# Altium PCB Prototype_1.PcbDoc
Units mm, origin at the board's own origin, x right, y up, seen from the top; angles counter-clockwise.
Board outline 94.49 x 99.95 mm, 2 copper layers (Top Layer, Bottom Layer); 50 components, 46 nets, 192 pads, 72 vias.
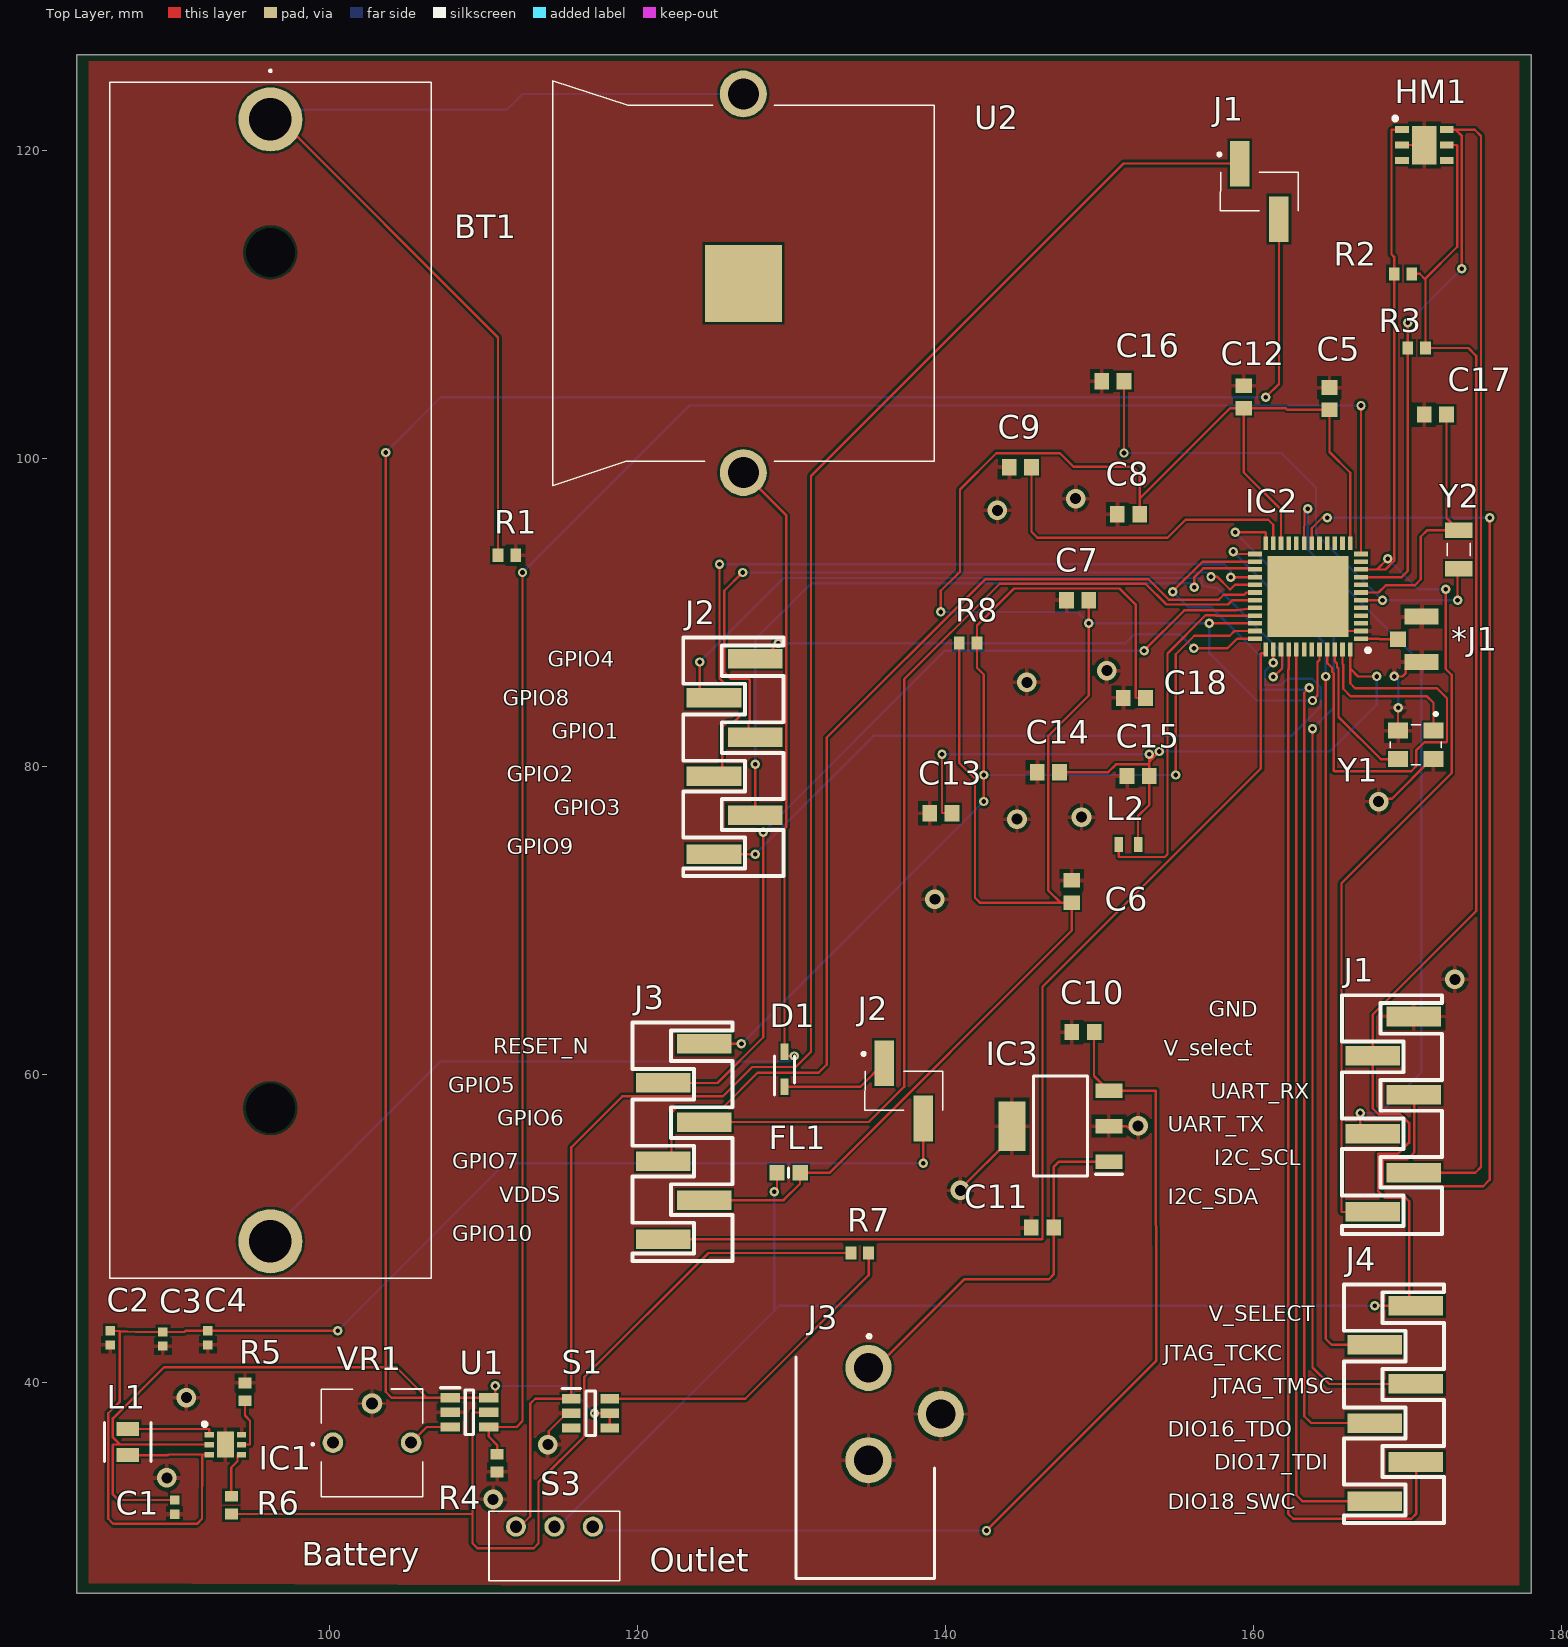
[diagram p0: Top Layer view]
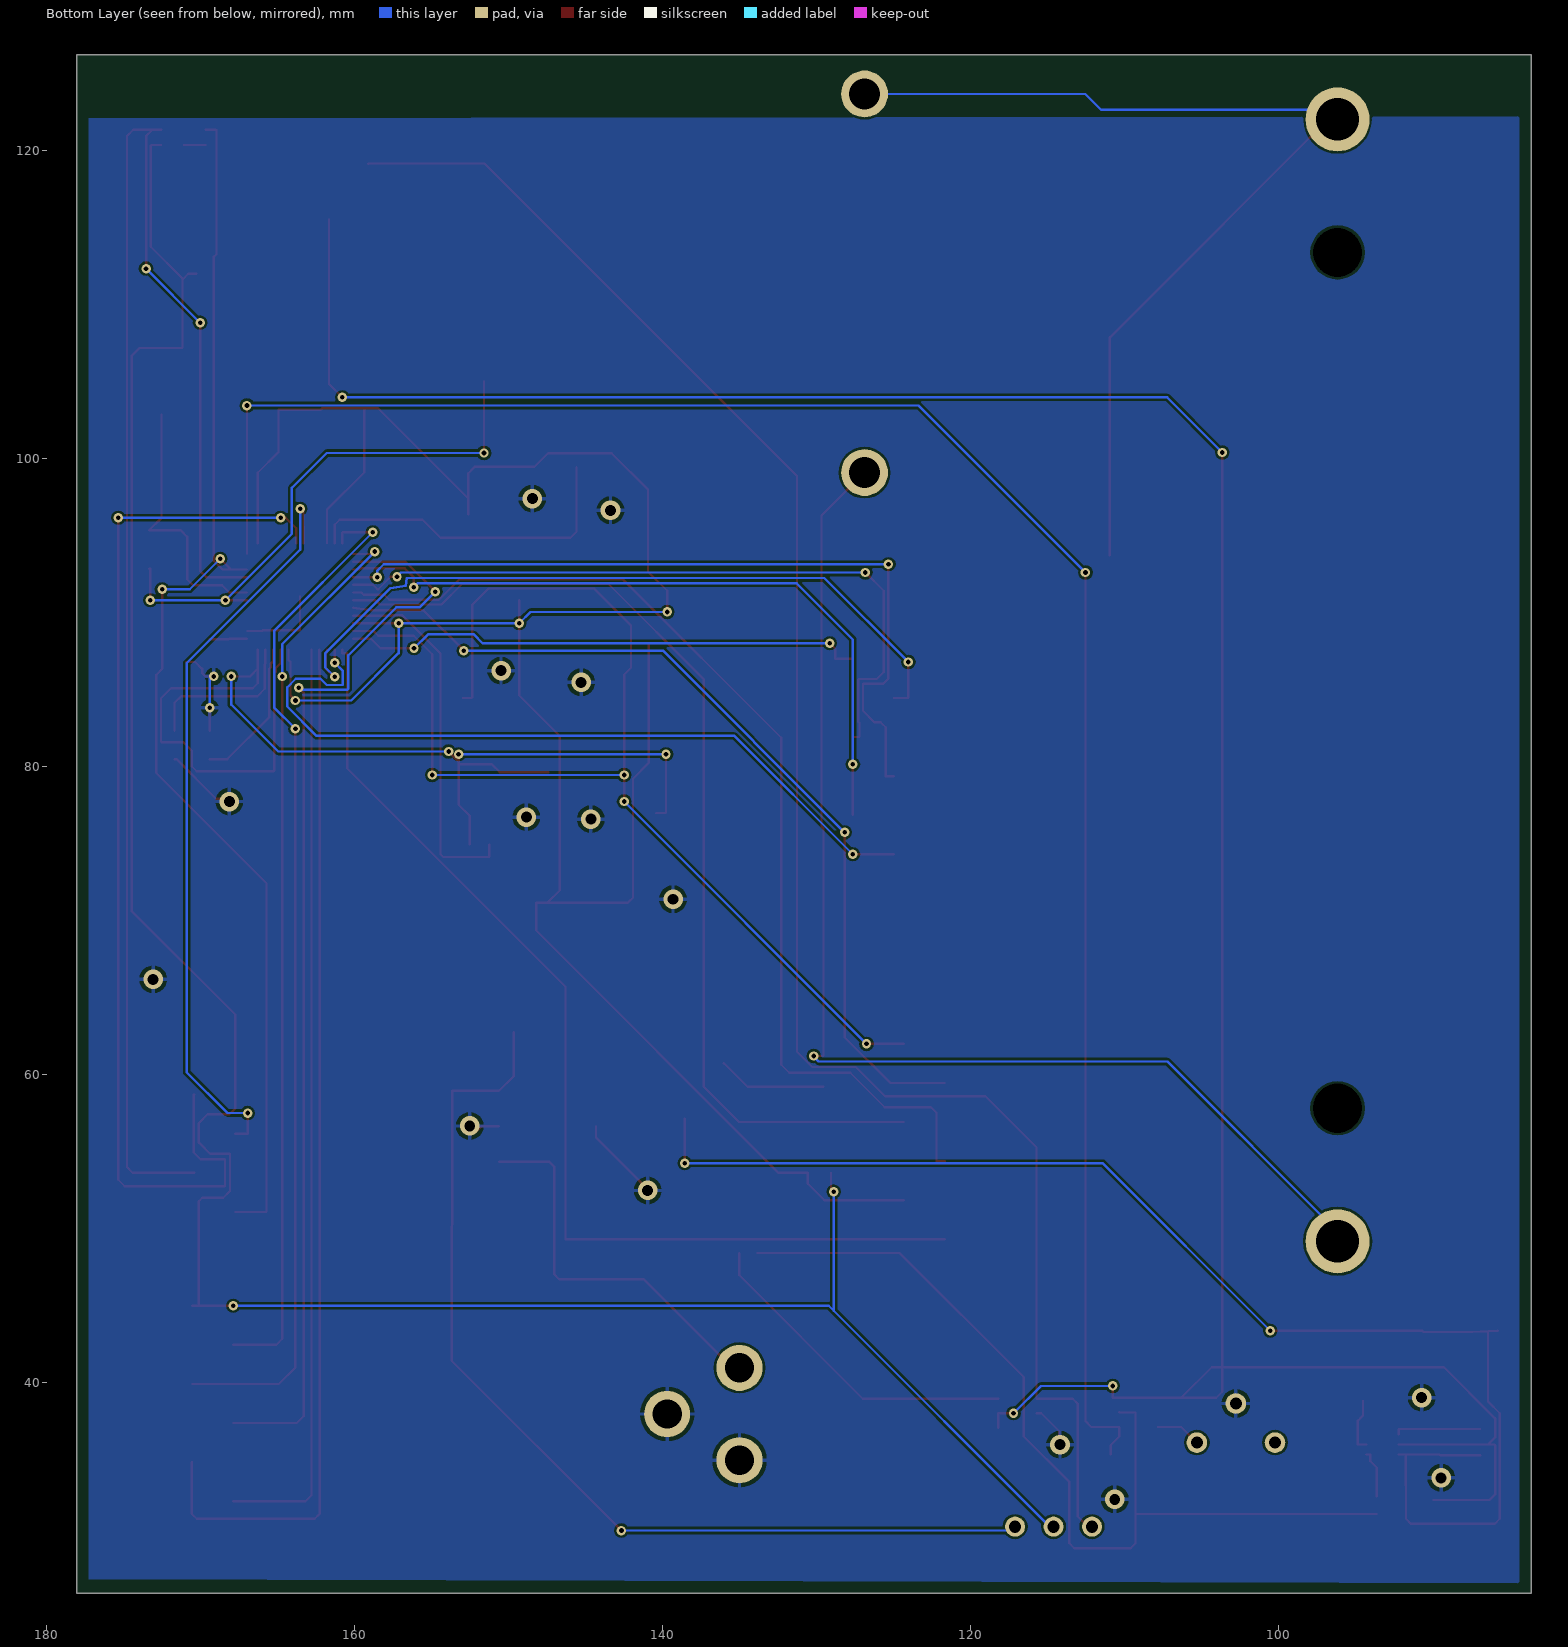
[diagram p1: Bottom Layer view, seen from below]
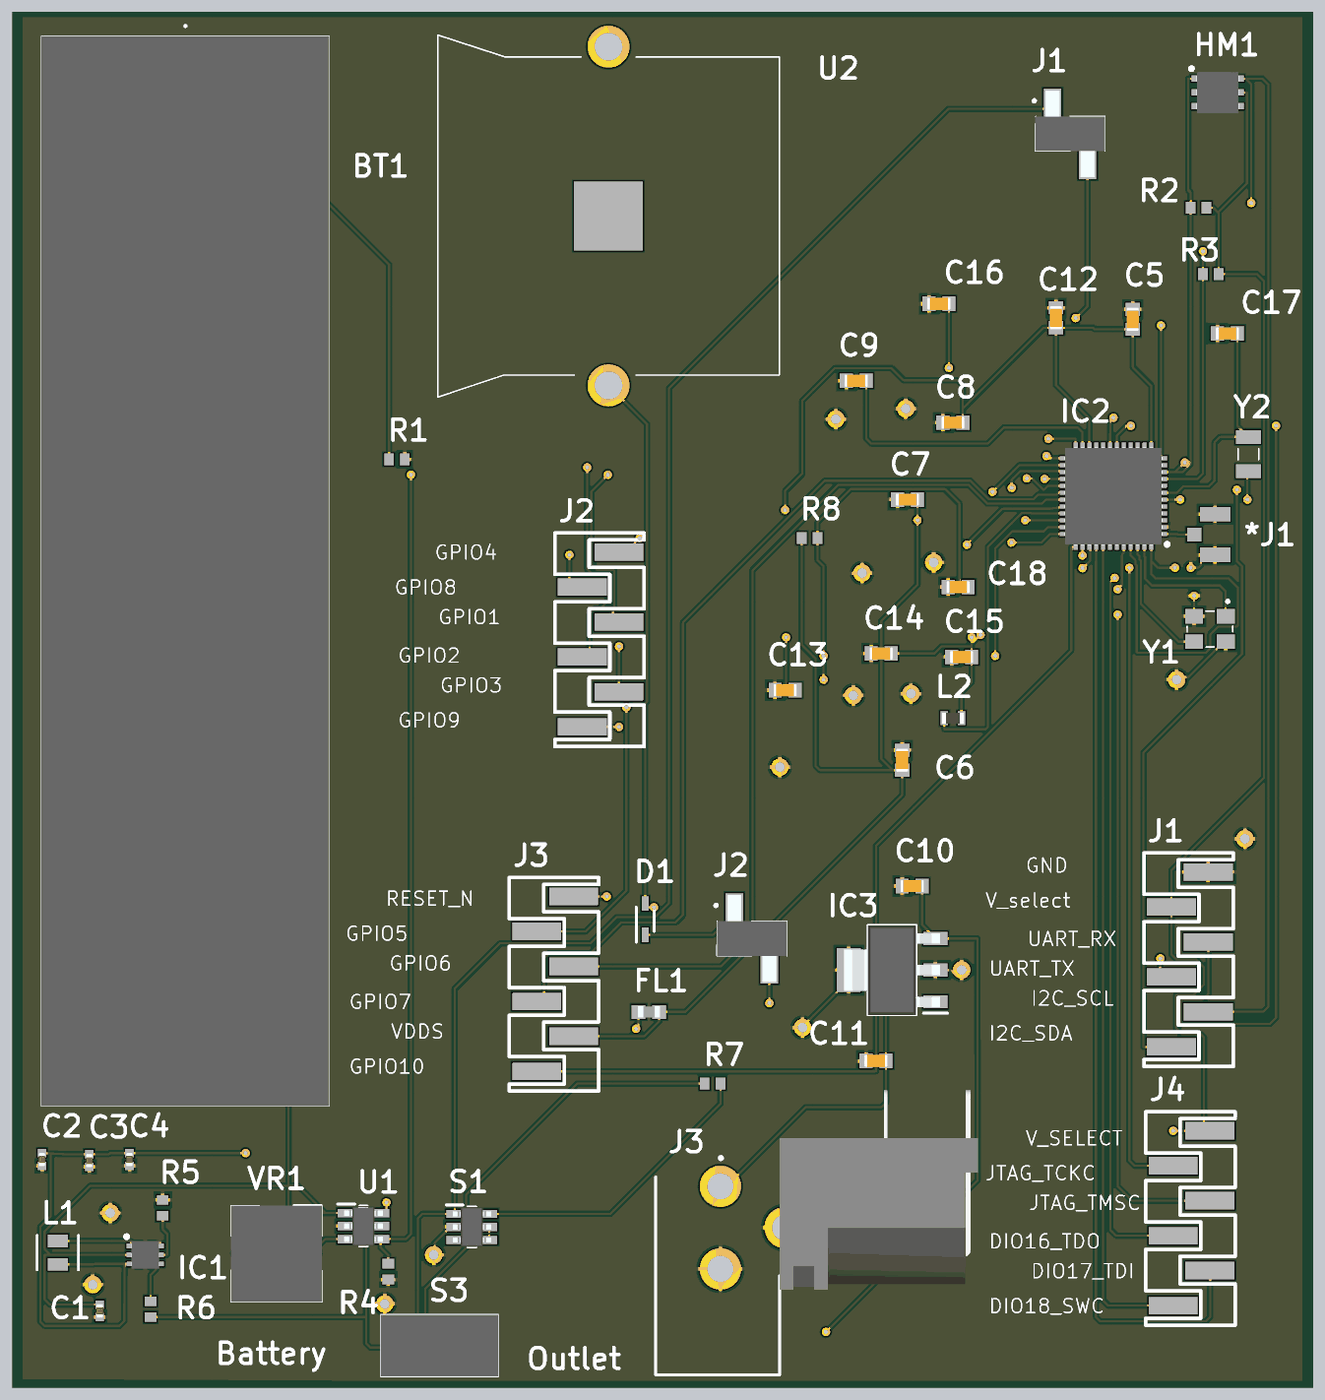
[diagram p2: 3D render of the assembled board from above, using the file's embedded part models]

## Layer stack, top to bottom
Top Solder: solder mask 0.0102, Solder Resist, Dk 3.5
Top Layer: signal copper 0.0356
Dielectric 1: dielectric 0.32, FR-4, Dk 4.8
Bottom Layer: signal copper 0.0356
Bottom Solder: solder mask 0.0102, Solder Resist, Dk 3.5

## Board outline
83.566,26.289 83.566,126.238 178.054,126.238 178.054,26.289

## Design rules (kind name [scope] priority, off if disabled: settings)
BoardOutlineClearance [All] p1: gap=0.406 ignorepadtopadclearanceinfootprint=FALSE except(0: Arc-SplitContinuation Track-SplitContinuation SMDPad-SplitContinuation THPad-SplitContinuation Via-SplitContinuation Fill-SplitContinuation Poly-SplitContinuation Region-SplitContinuation Text-SplitContinuation)
Clearance [All] p1: gap=0.152 ignorepadtopadclearanceinfootprint=FALSE
HoleSize [All] p1: absolutevalues=TRUE maxlimit=6.223 minlimit=0.305 maxpercent=80.000 minpercent=20.000
MinimumSolderMaskSliver [All] p1 off: minsoldermaskwidth=0.254
NetAntennae [All] p1 off: netantennaetolerance=0
PolygonConnect [All] p1: connectstyle=Relief reliefconductorwidth=0.254 reliefentries=4 polygonreliefangle="90 Angle" airgapwidth=0.254
RoutingVias [All] p1: holewidth=0.305 width=0.61 viastyle="Through Hole" minholewidth=0.152 minwidth=0.305 maxholewidth=0.6 maxwidth=1.2
SilkToSilkClearance [All] p1 off: silktosilkclearance=0.254
SilkToSolderMaskClearance [IsPad] p1 off: minsilkscreentomaskgap=0.254 clearancetoexposedcopper=TRUE
SolderMaskExpansion [All] p1: expansion=0.102
Width [All] p1: maxlimit=2 minlimit=0.152 preferedwidth=0.152 minimp=50.000000 maximp=50.000000 favimp=50.000000
25 further rules are at their usual default settings.

## Classes and differential pairs
component class Sheet2.SchDoc: C12 C13 C14 C15 C16 C17 C18 FL1 J3 J4 L2 S3
component class Prototype_1: C10 C11 IC3 J3

## Components (designator, comment, footprint, x,y, rotation, side; value= is the part's Value field where it differs from the comment)
*J1 "UFL_Connector" UFL_Connector 168.893,90.265 r270 top
BT1 "BH-18650-PC" BH18650PC 96.139,122.049 r270 top
C1 "GRM155R71H471KA01D" CAPC1005X55N 89.916,31.877 r270 top
C2 "GRM155R71H471KA01D" CAPC1005X55N 85.725,42.878 r270 top
C3 "GRM155R71H471KA01D" CAPC1005X55N 89.154,42.799 r270 top
C4 "GRM155R71H471KA01D" CAPC1005X55N 92.075,42.878 r270 top
C5 ".1uF" CAPC1608X90X35ML10T15 164.956,103.898 r270 top
C6 ".1uF" CAPC1608X90X35ML10T15 148.209,71.882 r270 top
C7 ".1uF" CAPC1608X90X35ML10T15 148.59,90.805 r0 top
C8 "22uF" CAPC1608X90X35ML10T15 151.892,96.393 r0 top
C9 "1uF" CAPC1608X90X35ML10T15 144.87,99.441 r0 top
C10 "33uF" CAPC1608X90X35ML10T15 148.934,62.738 r0 top
C11 "33uF" CAPC1608X90X35ML10T15 146.304,50.038 r0 top
C12 ".1uF" CAPC1608X90X35ML10T15 159.385,104.013 r270 top
C13 "22uF" CAPC1608X90X35ML10T15 139.7,76.962 r0 top
C14 ".1uF" CAPC1608X90X35ML10T15 146.685,79.629 r0 top
C15 ".1uF" CAPC1608X90X35ML10T15 152.527,79.375 r0 top
C16 "12pF" CAPC1608X90X35ML10T15 150.876,105.029 r0 top
C17 "12pF" CAPC1608X90X35ML10T15 171.831,102.87 r0 top
C18 ".1uF" CAPC1608X90X35ML10T15 152.273,84.455 r0 top
D1 "1SS315TPH3F" SOD2513X110N 129.54,60.325 r90 top
FL1 "BLM18HE152SN1B" BEADC1608X95N 129.806,53.594 r0 top
HM1 "HDC1080DMBT" SON100P300X300X80-7N 171.122,120.38 r0 top
IC1 "TPS61291DRVT" SON65P200X200X80-7N 93.218,35.941 r0 top
IC2 "XCC1352R1F3RGZR" QFN50P700X700X100-49N-D 163.555,91.055 r180 top
IC3 "LM3940IMP-3.3_NOPB" SOT230P700X180-4N 147.472,56.628 r180 top
J1 "87898-0204" 878980204 160.401,117.37 r0 top
J1 "Header_Pin_6" Header_Pin_6 167.767,56.134 r270 top
J2 "87898-0204" 878980204 137.287,58.928 r0 top
J2 "Header_Pin_6" Header_Pin_6 124.968,79.375 r270 top
J3 "PJ-102A" PJ-102AH 139.301,37.925 r180 top
J3 "Header_Pin_6" Header_Pin_6 121.666,54.356 r270 top
J4 "Header_Pin_6" Header_Pin_6 167.894,37.338 r270 top
L1 "VLF302515MT-3R3M" VLF302515MT 86.868,36.107 r90 top
L2 "6.8uH" "SMD 0603_A" 151.892,74.93 r0 top
R1 "1 ohm" RESC1609X50X30LL10T20 111.506,93.726 r180 top
R2 "4.7k" RESC1609X50X30LL10T20 169.732,112.014 r0 top
R3 "4.7k" RESC1609X50X30LL10T20 170.621,107.188 r0 top
R4 "10k" RESC1609X50X30LL10T20 110.871,34.731 r270 top
R5 "0" RESC1609X50X30LL10T20 94.488,39.37 r270 top
R6 "0" RESC1609X50X30LL10T20 93.599,32.004 r90 top
R7 "0" RESC1609X50X30LL10T20 134.433,48.387 r0 top
R8 "100k" RESC1609X50X30LL10T20 141.478,88.011 r0 top
S1 "TPS22860DBVR" SOT95P280X145-6N 116.947,37.973 r0 top
S3 "MHSS1105" MHSS1105 114.594,29.357 r90 top
U1 "TPL5111DDCR" SOT95P280X110-6N 109.073,38.034 r0 top
U2 "BHX1-2032-PC" BHX12032PC 126.873,123.698 r270 top
VR1 "3362P-1-101LF" 3362P1101LF 100.203,36.068 r0 top
Y1 "CX2016DB48000C0FPLC1" CX2016DB48000C0FPLC1 170.561,81.407 r180 top
Y2 "FC-135_32.7680KA-AG0" FC135327680KAAG0 173.355,94.107 r270 top

## Footprints (in the part's own frame and the unit in brackets; to place one, negate y for a bottom-side part, rotate by r counter-clockwise, add the part's x,y. Pads: shape width x height; smd on the part's side, far side on the other; paste and mask are expansions set on the pad)
3362P1101LF [mm]
  round 1.337 hole 0.78: 1(0,0) 2(2.54,2.54) 3(5.08,0)
  silkscreen extent -1.36,-3.53 5.84,3.5, body extent -0.76,-3.53 5.84,3.46, height 4.95
878980204 [mm]
  rect 1.27x2.96 smd: 1(-1.27,1.8) 2(1.27,-1.8)
  silkscreen extent -2.7,-1.26 2.54,2.5, body extent -2.54,-3.15 2.54,3.15, height 8.43
BEADC1608X95N [mm]
  rect 1x1 smd: 1(-0.75,0) 2(0.75,0)
  silkscreen extent 0,-0.3 0,0.3, body extent -0.8,-0.4 0.8,0.4, height 0.95
BH18650PC [mm]
  round 4.155 hole 2.77: 1(0,0) 2(72.9,0)
  round 1.6 hole 3.2 unplated: MH1(8.645,0) MH2(64.255,0)
  silkscreen extent -3.2,-10.45 75.3,10.45, body extent -2.4,-10.45 75.3,10.45, height 21.31
BHX12032PC [mm]
  round 3.045 hole 2.03: 1(0,0) 2(24.6,0)
  rect 5x5 smd: 3(12.3,0)
  silkscreen extent -0.85,-12.4 25.45,12.4
CAPC1005X55N [mm]
  rect 0.6x0.62 smd: 1(-0.46,0) 2(0.46,0)
  body extent -0.5,-0.25 0.5,0.25, height 0.55
CAPC1608X90X35ML10T15 [mm] "Chip Capacitor, 2-Leads, Body 1.7x0.9mm, IPC Low Density"
  rect 0.95x1.05 smd: 1(-0.725,0) 2(0.725,0)
  body extent -0.85,-0.45 0.85,0.45, height 0.9
CX2016DB48000C0FPLC1 [mm]
  rect 1.3x1.05 smd: 1(-1.15,-0.925) 2(1.15,-0.925) 3(1.15,0.925) 4(-1.15,0.925)
  silkscreen extent -1.66,-2.1 1.66,1.3
FC135327680KAAG0 [mm]
  rect 1x1.8 smd: 1(-1.25,0) 2(1.25,0)
  silkscreen extent -0.4,-0.75 0.4,0.75
Header_Pin_6 [mm]
  rect 1.27x3.56 smd: 1(-7.62,2.67) 2(-5.08,0) 3(-2.54,2.67) 4(0,0) 5(2.53,2.67) 6(5.08,0)
  silkscreen extent -9,-2 6.5,4.5
MHSS1105 [mm]
  round 1.3 hole 0.8: 1(1.25,2.5) 2(1.25,0) 3(1.25,-2.5)
  silkscreen extent -2.25,-4.25 2.25,4.25, body extent -2.25,-4.25 2.25,4.25, height 4
PJ-102AH [mm]
  round 3 hole 1.9: 1(4.3,-3) 2(4.3,3) 3(-0.4,0)
  silkscreen extent 0,-5.17 9,10.7, body extent -14.4,-10 0,4.5, height 4.5
QFN50P700X700X100-49N-D [mm]
  rect 0.9x0.3 smd: 1(-3.45,2.75) 2(-3.45,2.25) 3(-3.45,1.75) 4(-3.45,1.25) 5(-3.45,0.75) 6(-3.45,0.25) 7(-3.45,-0.25) 8(-3.45,-0.75) 9(-3.45,-1.25) 10(-3.45,-1.75) 11(-3.45,-2.25) 12(-3.45,-2.75) 25(3.45,-2.75) 26(3.45,-2.25) 27(3.45,-1.75) 28(3.45,-1.25) 29(3.45,-0.75) 30(3.45,-0.25) 31(3.45,0.25) 32(3.45,0.75) 33(3.45,1.25) 34(3.45,1.75) 35(3.45,2.25) 36(3.45,2.75)
  rect 0.3x0.9 smd: 13(-2.75,-3.45) 14(-2.25,-3.45) 15(-1.75,-3.45) 16(-1.25,-3.45) 17(-0.75,-3.45) 18(-0.25,-3.45) 19(0.25,-3.45) 20(0.75,-3.45) 21(1.25,-3.45) 22(1.75,-3.45) 23(2.25,-3.45) 24(2.75,-3.45) 37(2.75,3.45) 38(2.25,3.45) 39(1.75,3.45) 40(1.25,3.45) 41(0.75,3.45) 42(0.25,3.45) 43(-0.25,3.45) 44(-0.75,3.45) 45(-1.25,3.45) 46(-1.75,3.45) 47(-2.25,3.45) 48(-2.75,3.45)
  rect 5.25x5.25 smd: 49(0,0)
  silkscreen extent -4.03,3.38 -3.78,3.62, body extent -3.55,-3.55 3.55,3.55, height 1
RESC1609X50X30LL10T20 [mm] "Chip Resistor, 2-Leads, Body 1.55x0.85mm, IPC High Density"
  rect 0.7x0.85 smd: 1(-0.575,0) 2(0.575,0)
  body extent -0.82,-0.48 0.82,0.48, height 0.5
"SMD 0603_A" [mm] "Molded Inductor, 2-Leads, Body 1,6x0,8mm"
  rect 0.55x1 smd: 1(-0.625,0) 2(0.625,0)
  body extent -0.8,-0.4 0.8,0.4, height 0.78
SOD2513X110N [mm]
  rect 1.05x0.5 smd: 1(-1.138,0) 2(1.138,0)
  silkscreen extent -1.66,-0.65 0.87,0.65
SON65P200X200X80-7N [mm]
  rect 0.6x0.35 smd: 1(-1.05,0.65) 2(-1.05,0) 3(-1.05,-0.65) 4(1.05,-0.65) 5(1.05,0) 6(1.05,0.65)
  rect 1.1x1.7 smd: 7(0,0)
  silkscreen extent -1.47,1.2 -1.22,1.45, body extent -1.05,-1 1.05,1, height 0.8
SON100P300X300X80-7N [mm]
  rect 0.9x0.45 smd: 1(-1.45,1) 2(-1.45,0) 3(-1.45,-1) 4(1.45,-1) 5(1.45,0) 6(1.45,1)
  rect 1.6x2.5 smd: 7(0,0)
  silkscreen extent -2.02,1.6 -1.77,1.85, body extent -1.55,-1.5 1.55,1.5, height 0.8
SOT95P280X110-6N [mm]
  rect 1.25x0.6 smd: 1(-1.25,0.95) 2(-1.25,0) 3(-1.25,-0.95) 4(1.25,-0.95) 5(1.25,0) 6(1.25,0.95)
  silkscreen extent -1.87,-1.45 0.28,1.6, body extent -1.4,-1.45 1.4,1.45, height 1.1
SOT95P280X145-6N [mm]
  rect 1.2x0.6 smd: 1(-1.25,0.95) 2(-1.25,0) 3(-1.25,-0.95) 4(1.25,-0.95) 5(1.25,0) 6(1.25,0.95)
  silkscreen extent -1.85,-1.45 0.3,1.6, body extent -1.4,-1.45 1.4,1.45, height 1.45
SOT230P700X180-4N [mm]
  rect 1.75x0.95 smd: 1(-3.15,2.3) 2(-3.15,0) 3(-3.15,-2.3)
  rect 1.75x3.2 smd: 4(3.15,0)
  silkscreen extent -4.02,-3.25 1.75,3.25, body extent -3.5,-3.25 3.5,3.25, height 1.8
UFL_Connector [mm] "CONN U.FL RCPT STR 50 OHM SMD"
  rect 1.05x2.2 smd: 1(0.525,2.05) 2(3.475,2.05)
  rect 1x1.05 smd: 3(2,0.525)
VLF302515MT [mm]
  rect 0.9x1.45 smd: 1(-0.85,0) 2(0.85,0)
  silkscreen extent -1.25,-1.5 1.25,1.5

## Part data
*J1: "CONN U.FL RCPT STR 50 OHM SMD"
BT1: "Battery", Manufacturer_Name="MPD (Memory Protection Devices)", Datasheet Link=http://www.memoryprotectiondevices.com/datasheets/BH-18650-PC-datasheet.pdf, Height=21.31mm, Manufacturer_Part_Number=BH-18650-PC
C1 C2 C3 C4: "Capacitor", Manufacturer_Name="Murata Electronics", Mouser Part Number=81-GRM36X471K50, RS Part Number=7235301, Datasheet Link=http://www.murata.com/~/media/webrenewal/support/library/catalog/products/capacitor/mlcc/c02e.pdf, Height=0.55mm, Manufacturer_Part_Number=GRM155R71H471KA01D, Mouser Price/Stock=https://www.mouser.com/Search/Refine.aspx?Keyword=81-GRM36X471K50, RS Price/Stock=https://uk.rs-online.com/web/p/products/7235301
C5 C6 C7 C8 C9 C10 C11 C12 C13 C14 C15 C16 C17 C18: library part CMP-2000-04945-1, "Chip Capacitor, 22 pF, +/- 5%, 50 V, -55 to 125 degC, 0603 (1608 Metric), RoHS, Tape and Reel", Capacitance=22pF, Case Size/Dimension=0603, Dielectric=C0G, Manufacturer=Murata, Package Description="2-Pin Surface Mount Device, Body 1.6 x 0.8 mm", Package Reference=603, Rated Voltage=50V, Tolerance (%)=±5%, Datasheet URL=https://datasheet.ciiva.com/11786/0900766b807a1cab-11786398.pdf, Datasheet Version=Jul-06, Manufacturer URL=http://www.murata.com/
D1: "Schottky Diode", Manufacturer_Name=Toshiba, Mouser Part Number=757-1SS315TPH3F, Datasheet Link=http://toshiba.semicon-storage.com/info/docget.jsp?did=2666&prodName=1SS315, Height=1.1mm, Manufacturer_Part_Number=1SS315TPH3F, Mouser Price/Stock=https://www.mouser.com/Search/Refine.aspx?Keyword=757-1SS315TPH3F
FL1: "Filter", Manufacturer_Name="Murata Electronics", Mouser Part Number=N/A, Datasheet Link=https://www.murata.com/en-us/products/productdetail?partno=BLM18HE152SN1%23, Height=0.95mm, Manufacturer_Part_Number=BLM18HE152SN1B, Mouser Price/Stock=https://www.mouser.com/Search/Refine.aspx?Keyword=N%2FA
HM1: "Hygrometer", Manufacturer_Name="Texas Instruments", Mouser Part Number=595-HDC1080DMBT, RS Part Number=1330170P, Datasheet Link=http://www.mouser.com/ds/2/405/hdc1080-844688.pdf, Height=0.8mm, Manufacturer_Part_Number=HDC1080DMBT, Mouser Price/Stock=https://www.mouser.com/Search/Refine.aspx?Keyword=595-HDC1080DMBT, RS Price/Stock=http://uk.rs-online.com/web/p/products/1330170P
IC1: "Integrated Circuit", Manufacturer_Name="Texas Instruments", Mouser Part Number=595-TPS61291DRVT, RS Part Number=9143112P, Datasheet Link=http://uk.rs-online.com/web/p/products/9143112P, Height=0.8mm, Manufacturer_Part_Number=TPS61291DRVT, Mouser Price/Stock=https://www.mouser.com/Search/Refine.aspx?Keyword=595-TPS61291DRVT, RS Price/Stock=http://uk.rs-online.com/web/p/products/9143112P
IC2: "Integrated Circuit", Manufacturer_Name="Texas Instruments", Datasheet Link=http://www.ti.com/lit/gpn/cc1352r, Height=1mm, Manufacturer_Part_Number=XCC1352R1F3RGZR
IC3: "Integrated Circuit", Manufacturer_Name="Texas Instruments", Manufacturer_Part_Number=LM3940IMP-3.3/NOPB, Mouser Part Number=926-LM3940IMP3.3NOPB, RS Part Number=5361546P, Datasheet Link=http://www.ti.com/lit/ds/symlink/lm3940.pdf, Height=1.8mm, Mouser Price/Stock=https://www.mouser.com/Search/Refine.aspx?Keyword=926-LM3940IMP3.3NOPB, RS Price/Stock=http://uk.rs-online.com/web/p/products/5361546P
J1 J2: "Connector", Manufacturer_Name=Molex, Mouser Part Number=538-87898-0204, Allied_Number=70967354, Allied Price/Stock=https://www.alliedelec.com/molex-incorporated-87898-0204/70967354/, Datasheet Link=https://www.molex.com/pdm_docs/sd/878980204_sd.pdf, Height=8.33mm, Manufacturer_Part_Number=87898-0204, Mouser Price/Stock=https://www.mouser.com/Search/Refine.aspx?Keyword=538-87898-0204
J3: "Connector", Manufacturer_Name=CUI, Mouser Part Number=490-PJ-102A, Datasheet Link=https://www.cui.com/product/resource/pj-102a.pdf, Manufacturer_Part_Number=PJ-102A, Mouser Price/Stock=https://www.mouser.com/Search/Refine.aspx?Keyword=490-PJ-102A
L1: "Inductor", Manufacturer_Name=TDK, Mouser Part Number=810-VLF302515MT-3R3M, Datasheet Link=https://product.tdk.com/info/en/documents/wdcatalog/withdrawn_inductor_commercial_power_vlf302515mt_en.pdf, Manufacturer_Part_Number=VLF302515MT-3R3M, Mouser Price/Stock=https://www.mouser.com/Search/Refine.aspx?Keyword=810-VLF302515MT-3R3M
L2: library part CMP-1392-00021-1, "Power Multilayer Inductor WE-PMI, L=0.47 µH", Inductance="0.47 µH", Manufacturer="Wuerth Elektronik", PartNumber=74479763147, ComponentLink1Description="Manufacturer URL", ComponentLink1URL=http://www.we-online.com, ComponentLink2Description=Datasheet, ComponentLink2URL=http://katalog.we-online.de/kataloge/eisos/media/pdf/74479763147.pdf, PackageReference="SMD 0603_A"
R1 R2 R3 R4 R5 R6 R7 R8: library part CMP-2000-03820-1, Manufacturer="Vishay Dale", Part Number=CRCW0603100KFKEA
S1: "Switch", Manufacturer_Name="Texas Instruments", Mouser Part Number=595-TPS22860DBVR, Datasheet Link=http://www.ti.com/lit/gpn/tps22860, Height=1.45mm, Manufacturer_Part_Number=TPS22860DBVR, Mouser Price/Stock=https://www.mouser.com/Search/Refine.aspx?Keyword=595-TPS22860DBVR
S3: "Switch", Manufacturer_Name=Apem, Mouser Part Number=642-MHSS1105, Datasheet Link=https://componentsearchengine.com/Datasheets/2/MHSS1105.pdf, Height=4mm, Manufacturer_Part_Number=MHSS1105, Mouser Price/Stock=https://www.mouser.com/Search/Refine.aspx?Keyword=642-MHSS1105
U1: "Undefined or Miscellaneous", Manufacturer_Name="Texas Instruments", Mouser Part Number=595-TPL5111DDCR, Datasheet Link=http://www.ti.com/lit/ds/symlink/tpl5111.pdf, Height=1.1mm, Manufacturer_Part_Number=TPL5111DDCR, Mouser Price/Stock=https://www.mouser.com/Search/Refine.aspx?Keyword=595-TPL5111DDCR
U2: "Undefined or Miscellaneous", Manufacturer_Name="MPD (Memory Protection Devices)", Datasheet Link=http://www.memoryprotectiondevices.com/datasheets/BHX1-2032-PC-datasheet.pdf, Height=4.16mm, Manufacturer_Part_Number=BHX1-2032-PC
VR1: "Variable Resistor", Manufacturer_Name=Bourns, Mouser Part Number=652-3362P-1-101LF, RS Part Number=5220877P, Allied_Number=70154047, Allied Price/Stock=https://www.alliedelec.com/bourns-3362p-1-101lf/70154047/, Datasheet Link=https://www.bourns.com/docs/Product-Datasheets/3362.pdf, Height=4.95mm, Manufacturer_Part_Number=3362P-1-101LF, Mouser Price/Stock=https://www.mouser.com/Search/Refine.aspx?Keyword=652-3362P-1-101LF, RS Price/Stock=http://uk.rs-online.com/web/p/products/5220877P
Y1: "Crystal or Oscillator", Manufacturer_Name="Kyocera Electronic Components", Mouser Part Number=581-CX2016DB48CFPLC1, Datasheet Link=https://componentsearchengine.com/Datasheets/1/CX2016DB48000C0FPLC1.pdf, Manufacturer_Part_Number=CX2016DB48000C0FPLC1, Mouser Price/Stock=https://www.mouser.com/Search/Refine.aspx?Keyword=581-CX2016DB48CFPLC1
Y2: "Crystal or Oscillator", Manufacturer_Name="Epson Timing", Manufacturer_Part_Number="FC-135 32.7680KA-AG0", Mouser Part Number=732-FC135-32.76KAAG0, Datasheet Link=https://support.epson.biz/td/api/doc_check.php?dl=brief_FC-135&lang=en/.pdf, Height=0mm, Mouser Price/Stock=https://www.mouser.com/Search/Refine.aspx?Keyword=732-FC135-32.76KAAG0

## Via types
v1: diameter 0.61, hole 0.305, Top Layer to Bottom Layer, 57 vias
v2: diameter 1.27, hole 0.711, Top Layer to Bottom Layer, 15 vias

## Nets (pads, with @x,y where several pads share a name; then routed paths per layer and width w, separated by ;. In a path a pad name is that pad's centre, name@x,y a point inside that pad or via, vN(x,y) a via of type N, cw(c..) or ccw(c..) an arc to the next point about the centre after c; other vN are vias at no path point)
DCDC_SW: IC2.33 L2.1 | length 23.8
  Top Layer w0.152: L2.1 151.267,74.143 151.292,74.117 154.254,74.117 154.432,74.295 154.432,87.351 156.92,89.838 157.548,89.838 157.582,89.805 IC2.33
DIO16_TDO: IC2.26 J4.4 | length 71.2
  Top Layer w0.152: v1(154.762,91.364) 156.703,93.305 IC2.26 ; v1(163.639,85.115) 163.322,84.798 163.322,37.782 163.766,37.338 J4.4
  Bottom Layer w0.152: v1(154.762,91.364) 155.786,90.34 157.299,90.34 160.419,87.22 160.419,85.06 160.49,84.988 163.512,84.988 v1(163.639,85.115)
DIO17_TDI: IC2.40 J4.5 | length 68.1
  Top Layer w0.152: IC2.40 162.305,86.316 162.281,86.292 162.281,31.432 162.598,31.115 170.269,31.115 170.586,31.432 170.586,34.808 J4.5
DIO18_SWO: IC2.41 J4.6 | length 60.2
  Top Layer w0.152: IC2.41 162.805,32.648 163.195,32.258 J4.6
DONE: IC2.12 R4.1 U1.4 | length 128.1
  Top Layer w0.152: R4.1 110.871,35.916 110.323,36.464 U1.4 112.141,37.084 112.522,37.465 v1(112.522,92.608) ; IC2.12 v1(167.005,103.452)
  Bottom Layer w0.152: v1(112.522,92.608) 123.366,103.452 v1(167.005,103.452)
GND: *J1.1 *J1.2 C1.2 C2.2 C3.2 C4.2 C5.1 C6.1 C7.1 C8.1 C9.1 C10.1 C11.1 C12.1 C13.1 C14.1 C15.1 C16.1 C17.1 C18.1 HM1.2 HM1.7 IC1.6 IC1.7 IC2.2 IC2.49 IC3.2 IC3.4 J1.1@170.437,63.754 J3.2@135.001,34.925 J3.3@139.701,37.925 R1.1 R4.2 R5.1 S1.2 U1.2 VR1.2 Y1.2 Y1.4 | length 27.9
  Top Layer w0.152: v2(114.173,35.941) 114.229,35.997 114.229,36.805 115.397,37.973 S1.2 ; v2(140.97,52.451) 140.97,52.551 144.322,55.903 IC3.4 ; IC3.2 151.771,56.628 v2@152.142,56.257 ; IC2.49 163.555,88.849 165.97,88.849 166.014,88.805 IC2.2 ; v2(168.148,77.724) 168.332,77.908 169.012,77.908 171.586,80.482 Y1.4 ; v1(169.164,85.852) 169.697,85.852 169.919,86.074 169.919,86.341 170.368,86.79 *J1.2 ; Y1.2 169.411,83.813 v1(169.418,83.82) ; HM1.2 HM1.7
  Bottom Layer w0.152: v1(169.164,85.852) 169.278,85.852 169.418,85.712 v1(169.418,83.82)
  other v2: 110.617,32.385 89.408,33.782 90.678,38.989 152.527,56.642 173.101,66.167 139.319,71.374 144.653,76.581 148.844,76.708 145.288,85.471 150.495,86.233 143.383,96.647 148.463,97.409
GPIO1: IC2.29 J2.3 | length 46.9
  Top Layer w0.152: v1(126.822,92.608) 125.628,91.415 125.628,86.131 126.076,85.684 127.254,85.684 127.281,85.657 127.281,82.909 127.203,82.831 127.203,81.915 J2.3 ; v1(157.254,92.339) 157.655,92.339 158.477,91.516 158.528,91.516 158.817,91.805 IC2.29
  Bottom Layer w0.152: v1(126.822,92.608) 156.985,92.608 v1(157.254,92.339)
GPIO2: IC2.28 J2.4 | length 51.9
  Top Layer w0.152: J2.4 125.501,79.375 125.501,82.55 125.819,82.867 126.227,82.867 126.977,83.617 126.977,85.344 126.951,85.369 125.679,85.369 125.324,85.725 v1(125.324,93.142) ; v1(158.547,92.305) IC2.28
  Bottom Layer w0.152: v1(125.324,93.142) 158.115,93.142 158.547,92.71 v1(158.547,92.305)
GPIO3: IC2.27 J2.5 | length 46.4
  Top Layer w0.152: v1(127.635,80.137) 127.635,76.845 J2.5 ; v1(156.159,91.656) 156.159,92.275 156.756,92.872 159.69,92.872 159.69,92.805 IC2.27
  Bottom Layer w0.152: v1(127.635,80.137) 127.635,88.252 131.28,91.897 155.918,91.897 v1(156.159,91.656)
GPIO4: IC2.36 J2.1@127.638,86.995 | length 34.1
  Top Layer w0.152: J2.1@127.638,86.995 128.778,86.995 128.778,87.655 v1(129.134,88.011) ; v1(156.147,87.681) 158.329,87.681 158.953,88.305 IC2.36
  Bottom Layer w0.152: v1(129.134,88.011) 151.689,88.011 152.26,88.582 155.245,88.582 v1(156.147,87.681)
GPIO5: IC2.32 J3.2@121.666,59.436 | length 59
  Top Layer w0.152: J3.2@121.666,59.436 125.197,59.436 128.168,62.408 v1(128.168,75.717) ; v1(152.908,87.528) 155.523,90.143 158.944,90.143 IC2.32
  Bottom Layer w0.152: v1(128.168,75.717) 139.979,87.528 v1(152.908,87.528)
GPIO6: IC2.31 J3.3@124.336,56.896 | length 66.4
  Top Layer w0.152: J3.3@124.336,56.896 135.024,56.896 137.329,59.201 137.329,85.676 143.525,91.872 153.01,91.872 154.357,90.524 158.368,90.524 158.648,90.805 IC2.31
GPIO7: IC2.30 J3.4 | length 69.2
  Top Layer w0.152: J3.4 122.199,54.356 122.199,57.506 122.555,57.861 125.563,57.861 127.798,60.096 131.762,60.096 132.283,60.617 132.283,81.864 142.596,92.177 153.175,92.177 154.522,90.829 157.752,90.829 158.083,91.161 159.426,91.161 159.571,91.305 IC2.30
GPIO8: IC2.39 J2.2@124.968,84.455 | length 49.5
  Top Layer w0.152: v1(124.028,86.792) 124.028,84.455 J2.2@124.968,84.455 ; v1(161.303,85.827) 161.341,85.827 161.874,86.36 161.874,87.231 IC2.39
  Bottom Layer w0.152: v1(124.028,86.792) 129.489,92.253 156.629,92.253 156.693,91.738 157.672,91.591 161.925,87.338 161.925,86.449 v1(161.303,85.827)
GPIO9: IC2.38 J2.6 | length 51.2
  Top Layer w0.152: J2.6 v1(127.635,74.295) ; v1(161.305,86.741) IC2.38
  Bottom Layer w0.152: v1(127.635,74.295) 135.331,81.991 162.484,81.991 164.389,83.896 164.389,85.141 163.83,85.7 162.23,85.7 161.823,85.293 160.795,85.293 160.769,85.319 160.769,86.205 v1(161.305,86.741)
GPIO10: IC2.37 J3.6 | length 69.1
  Top Layer w0.152: J3.6 146.279,49.276 146.304,49.301 146.304,65.684 160.49,79.87 160.49,87.325 160.523,87.358 160.805,87.358 IC2.37
hot1: IC2.47 Y1.1 | length 10.6
  Top Layer w0.152: IC2.47 165.805,86.674 165.849,86.629 165.849,85.046 166.338,84.557 171.292,84.557 171.711,84.138 Y1.1
hot2: IC2.46 Y1.3 | length 9.5
  Top Layer w0.152: IC2.46 165.305,86.829 165.447,86.686 165.447,86.466 165.544,86.369 165.544,83.225 168.287,80.482 Y1.3
I2C_SCL: HM1.6 IC2.9 J1.5 R3.1 | length 107.4
  Top Layer w0.152: IC2.9 169.647,92.305 170.046,92.704 R3.1 v1(170.046,108.839) ; J1.5 174.432,53.604 174.803,53.975 174.803,120.968 174.39,121.38 173.146,121.38 ; HM1.6 173.146,121.38 ; v1(173.558,112.351) 173.558,120.968 173.146,121.38
  Bottom Layer w0.152: v1(170.046,108.839) v1(173.558,112.351)
I2C_SDA: HM1.1 IC2.10 J1.6 R2.1 | length 82.3
  Top Layer w0.152: IC2.10 168.046,92.805 ; J1.6 165.76,51.054 165.735,51.079 165.735,72.415 172.898,79.578 172.898,85.954 172.517,86.335 v1(172.517,91.516) ; v1(168.739,93.497) 168.046,92.805 ; HM1.1 169.012,121.38 168.986,121.355 168.986,113.284 169.157,113.113 R2.1 169.157,93.369 168.593,92.805 168.046,92.805
  Bottom Layer w0.152: v1(168.739,93.497) 170.72,91.516 v1(172.517,91.516)
JTAG_TCKC: IC2.25 J4.2 | length 58.5
  Top Layer w0.152: v1(158.693,93.964) 158.852,93.805 IC2.25 ; v1(164.706,85.848) 164.706,42.812 165.1,42.418 J4.2
  Bottom Layer w0.152: v1(158.693,93.964) 164.706,87.951 v1(164.706,85.848)
JTAG_TMSC: IC2.24 J4.3 | length 67.3
  Top Layer w0.152: v1(158.826,95.225) 160.78,95.225 160.805,95.199 IC2.24 ; v1(163.855,82.448) 163.855,40.957 164.935,39.878 J4.3
  Bottom Layer w0.152: v1(158.826,95.225) 165.24,88.811 165.24,83.833 v1(163.855,82.448)
NetBT1_1: BT1.1 R1.2 U2.1 | length 66.2
  Top Layer w0.152: BT1.1@96.139,122.675 110.931,107.883 R1.2
  Bottom Layer w0.152: BT1.1@96.139,122.675 111.506,122.675 112.529,123.698 U2.1
NetBT1_2: BT1.2 D1.2 U2.2 | length 78.5
  Top Layer w0.152: U2.2 129.667,96.304 129.667,76.098 129.54,75.971 D1.2 129.54,61.189 v1(130.175,61.189)
  Bottom Layer w0.152: BT1.2@96.139,49.775 107.197,60.833 129.857,60.833 130.175,61.151 v1(130.175,61.189)
NetC9_2: C9.2 IC2.23 | length 21.9
  Top Layer w0.152: C9.2 145.595,95.25 145.976,94.869 154.432,94.869 155.6,96.037 160.972,96.037 161.305,95.705 IC2.23
NetC11_2: C11.2 IC3.1 J3.1@135.001,40.925 | length 25.6
  Top Layer w0.152: J3.1@134.873,40.338 141.207,46.672 146.712,46.672 147.029,46.99 C11.2 147.029,53.975 147.382,54.328 IC3.1
NetC16_2: C16.2 IC2.6 Y2.2 | length 35.6
  Top Layer w0.152: v1(151.601,100.367) C16.2 ; IC2.6 v1(168.402,90.805) ; v1(173.279,90.805) 173.279,92.857 Y2.2
  Bottom Layer w0.152: v1(151.601,100.367) 161.825,100.367 164.084,98.108 164.084,95.123 v1(168.402,90.805) v1(173.279,90.805)
NetC17_2: C17.2 IC2.7 Y2.1 | length 17.5
  Top Layer w0.152: IC2.7 168.148,91.305 168.613,91.77 170.498,91.77 170.891,92.164 170.891,94.932 171.316,95.357 Y2.1 172.556,96.156 C17.2
NetD1_1: D1.1 J2.1@136.017,60.728 | length 7.1
  Top Layer w0.152: D1.1 134.476,59.187 J2.1@136.017,60.728
NetIC1_4: IC1.4 R6.2 | length 3.1
  Top Layer w0.152: R6.2 93.599,34.455 94.005,34.861 94.005,35.291 IC1.4
NetIC1_5: IC1.5 R5.2 | length 3.5
  Top Layer w0.152: IC1.5 94.793,35.941 94.818,35.966 94.818,37.49 94.488,37.821 R5.2
NetR7_2: R7.2 S1.6 | length 21.6
  Top Layer w0.152: S1.6 126.992,38.923 135.008,46.939 R7.2
NetU1_3: U1.3 VR1.3 | length 3
  Top Layer w0.152: VR1.3 106.299,37.084 U1.3
RESET_N: C18.2 IC2.35 J3.1@124.336,61.976 R8.2 | length 80.8
  Top Layer w0.152: J3.1@124.336,61.976 v1(126.746,61.976) ; v1(142.494,77.724) v1(142.494,79.451) 142.494,85.979 142.053,86.42 R8.2 142.053,89.158 144.463,91.567 151.307,91.567 152.375,90.499 152.375,84.48 152.4,84.455 C18.2 ; v1(154.965,79.451) 154.965,87.287 156.172,88.494 158.471,88.494 158.782,88.805 IC2.35
  Bottom Layer w0.152: v1(126.746,61.976) v1(142.494,77.724) ; v1(142.494,79.451) v1(154.965,79.451)
RF_P_2_4: *J1.3 IC2.1 | length 2.4
  Top Layer w0.152: IC2.1 168.173,88.305 168.213,88.265 *J1.3
TPL_DRV: R6.1 R7.1 U1.5 | length 62.5
  Top Layer w0.152: R6.1 109.271,31.429 ; U1.5 109.271,38.009 109.271,31.429 ; R7.1 124.6,48.387 116.535,40.322 116.535,36.474 113.563,33.503 113.563,29.527 113.246,29.21 109.588,29.21 109.271,29.527 109.271,31.429
UART_RX: IC2.18 J1.3 | length 70.6
  Top Layer w0.152: IC2.18 163.805,95.479 164.491,96.164 v1(164.808,96.164) ; J1.3 170.459,58.674 170.459,54.927 170.015,54.483 168.453,54.483 168.427,54.458 168.427,52.756 168.453,52.73 174.942,52.73 175.362,53.149 v1(175.362,96.164)
  Bottom Layer w0.152: v1(164.808,96.164) v1(175.362,96.164)
UART_TX: IC2.19 J1.4 | length 49.4
  Top Layer w0.152: IC2.19 163.33,96.749 v1(163.551,96.749) ; v1(166.954,57.48) 166.954,56.134 J1.4
  Bottom Layer w0.152: v1(163.551,96.749) 163.551,94.082 170.917,86.716 170.917,60.122 168.275,57.48 v1(166.954,57.48)
V_Barrel: C10.2 IC3.3 S3.3 | length 66
  Top Layer w0.152: v1(142.672,30.353) 153.69,41.372 153.667,58.928 IC3.3 149.659,59.891 C10.2
  Bottom Layer w0.152: S3.3@117.094,30.353 v1(142.672,30.353)
V_L: IC1.1 L1.2 | length 5.7
  Top Layer w0.152: L1.2 92.143,36.957 92.168,36.932 IC1.1
V_select: FL1.1 HM1.5 J1.2@167.767,61.214 J4.1 R2.2 R3.2 S3.2 | length 159.9
  Top Layer w0.152: v1(128.88,52.375) 129.056,52.551 FL1.1 ; v1(167.894,44.958) J4.1@170.129,44.958 ; R2.2 170.815,112.014 171.196,111.633 ; J4.1 J4.1@170.129,44.958 ; HM1.5 173.228,120.38 173.253,120.355 173.253,113.767 171.196,111.709 171.196,111.633 ; J4.1@170.129,44.958 170.129,51.752 169.903,51.978 168.545,51.978 168.105,52.417 168.105,54.813 168.133,54.841 169.407,54.841 170.129,55.562 170.129,56.832 169.558,57.404 168.148,57.404 167.767,57.785 167.767,61.214 167.767,63.881 174.498,70.612 174.498,106.68 173.99,107.188 R3.2 171.196,111.633
  Bottom Layer w0.152: S3.2@114.594,30.353 128.88,44.639 ; v1(128.88,52.375) 128.88,44.639 ; v1(167.894,44.958) 129.199,44.958 128.88,44.639
V_switch: J1.1@159.131,119.17 S1.1 S3.1 | length 119.6
  Top Layer w0.152: S3.1@112.094,30.353 113.03,31.289 113.03,38.606 113.347,38.923 S1.1 115.697,55.258 119.012,58.572 125.547,58.572 127.452,60.477 130.277,60.477 131.267,61.468 131.267,98.882 151.562,119.177 159.131,119.177 J1.1@159.131,119.17
VCC3V3: C1.1 IC1.2 J1.2@161.671,115.57 S1.4 S1.5 U1.1 U1.6 | length 187
  Top Layer w0.152: C1.1 86.268,32.337 85.903,32.703 85.903,35.916 85.928,35.941 86.36,35.941 ; IC1.2 86.36,35.941 ; v1(103.632,100.406) 103.632,40.97 ; v1(110.744,39.751) 110.744,38.984 U1.6 U1.1 106.304,38.984 ; v1(117.196,37.973) S1.5 S1.4 ; v1(160.807,103.988) 161.671,104.851 J1.2@161.671,115.57 ; 86.36,35.941 85.903,36.398 85.903,37.643 89.23,40.97 103.632,40.97 ; 103.632,40.97 104.318,40.97 106.304,38.984 ; 103.632,40.97 103.632,39.37 104.018,38.984 106.304,38.984
  Bottom Layer w0.152: v1(103.632,100.406) 107.213,103.988 v1(160.807,103.988) ; v1(110.744,39.751) 115.418,39.751 v1(117.196,37.973)
VDDR: C13.2 C14.2 C15.2 IC2.45 IC2.48 L2.2 | length 78.7
  Top Layer w0.152: v1(139.776,80.797) 139.776,76.987 C13.2 ; C14.2 150.571,79.629 151.079,80.137 153.227,80.137 153.252,80.112 ; L2.2 152.517,76.784 153.252,77.519 C15.2 153.252,80.112 ; v1(153.252,80.797) 153.252,80.329 ; v1(153.899,80.975) 153.252,80.329 ; IC2.45 164.805,86.719 165.143,86.382 165.143,86.161 165.24,86.064 165.24,79.731 165.278,79.692 170.269,79.692 170.586,80.01 170.586,81.032 171.132,81.578 172.558,81.578 172.59,81.61 172.59,84.433 171.933,85.09 166.622,85.09 166.305,85.407 166.305,86.36 ; IC2.48 166.305,86.36 ; v1(168.021,85.852) 166.813,85.852 166.305,86.36 ; 153.252,80.112 153.252,80.329
  Bottom Layer w0.152: v1(139.776,80.797) v1(153.252,80.797) ; v1(153.899,80.975) 164.973,80.975 168.021,84.023 v1(168.021,85.852)
VDDS: C5.2 C6.2 C7.2 C8.2 C12.2 FL1.2 IC2.13 IC2.22 IC2.34 IC2.44 J3.5 R8.1 | length 170.1
  Top Layer w0.152: J3.5 129.489,51.826 130.556,52.893 FL1.2 132.461,53.594 148.209,69.342 C6.2 147.472,71.157 ; v1(139.7,90.043) 139.7,91.415 140.945,92.659 140.945,97.993 143.307,100.355 147.447,100.355 148.336,99.466 152.211,99.466 152.617,99.06 152.617,97.397 ; R8.1 140.903,80.229 141.922,79.21 141.922,71.475 142.24,71.157 147.472,71.157 ; C7.2 v1(149.315,89.305) 149.315,84.621 146.685,81.991 146.685,71.944 147.472,71.157 ; C8.2 152.617,97.397 ; v1(157.15,89.305) IC2.34 ; IC2.22 161.805,96.691 159.385,99.111 C12.2 ; v1(163.855,84.29) 164.173,84.607 164.173,86.787 164.305,86.919 IC2.44 ; IC2.13 166.305,99.085 164.956,100.434 C5.2 162.218,103.173 162.103,103.288 C12.2 ; 152.617,97.397 158.508,103.288 C12.2
  Bottom Layer w0.152: v1(139.7,90.043) 148.577,90.043 v1(149.315,89.305) v1(157.15,89.305) 157.15,87.367 160.227,84.29 v1(163.855,84.29)
Vin: C2.1 C3.1 C4.1 IC1.3 J2.2@138.557,57.128 L1.1 | length 88.6
  Top Layer w0.152: C2.1 86.36,43.308 ; L1.1 89.484,35.257 89.518,35.291 91.719,35.291 ; IC1.3 91.719,35.291 ; v1(100.513,43.338) C4.1 90.63,43.338 90.551,43.259 C3.1 87.376,43.259 86.36,43.308 ; v1(138.557,54.229) J2.2@138.557,57.128 ; 86.36,43.308 86.36,38.735 85.598,37.973 85.598,31.115 85.928,30.785 91.364,30.785 91.694,31.115 91.719,35.291
  Bottom Layer w0.152: v1(100.513,43.338) 111.404,54.229 v1(138.557,54.229)
pads on no net: BT1.MH1 BT1.MH2 HM1.3 HM1.4 IC2.3 IC2.4 IC2.5 IC2.8 IC2.11 IC2.14 IC2.15 IC2.16 IC2.17 IC2.20 IC2.21 IC2.42 IC2.43 S1.3 U2.3 VR1.1

## Polygon pours and split planes (outlines as drawn)
GND on Top Layer "Top Layer-GND" (solid, pour order 2): 84.329,26.924 84.329,125.984 177.292,125.984 177.292,26.797 111.125,26.797
no net on Top Layer "Top Layer-No Net" (solid, pour order 0): 83.947,25.4
GND on Bottom Layer (solid, pour order 4): 84.328,26.924 177.292,27.178 177.292,122.112 84.328,122.239

## Silkscreen, mask and mechanical layers (free items; w line width, h text height)
Top Overlay:
  text "GPIO4" at 114.173,86.487 h1.02
  text "GPIO8" at 111.252,83.947 h1.02
  text "GPIO1" at 114.427,81.788 h1.02
  text "GPIO2" at 111.506,78.994 h1.02
  text "GPIO3" at 114.554,76.835 h1.02
  text "GPIO9" at 111.506,74.295 h1.02
  text "GND" at 157.099,63.754 h1.02
  text "RESET_N" at 110.617,61.341 h1.02
  text "V_select" at 154.178,61.214 h1.02
  text "GPIO5" at 107.696,58.801 h1.02
  text "UART_RX" at 157.226,58.42 h1.02
  text "GPIO6" at 110.871,56.642 h1.02
  text "UART_TX" at 154.432,56.261 h1.02
  text "I2C_SCL" at 157.48,54.102 h1.02
  text "GPIO7" at 107.95,53.848 h1.02
  text "VDDS" at 110.998,51.689 h1.02
  text "I2C_SDA" at 154.432,51.562 h1.02
  text "GPIO10" at 107.95,49.149 h1.02
  text "V_SELECT" at 157.099,43.942 h1.02
  text "JTAG_TCKC" at 154.178,41.402 h1.02
  text "JTAG_TMSC" at 157.353,39.243 h1.02
  text "DIO16_TDO" at 154.432,36.449 h1.02
  text "DIO17_TDI" at 157.48,34.29 h1.02
  text "DIO18_SWC" at 154.432,31.75 h1.02
  text "Battery" at 98.171,28.067 h1.52
  text "Outlet" at 120.777,27.686 h1.52
Board Outline:
  lines w0.254: 83.566,26.289 85.09,26.289 178.054,26.289 178.054,126.238 83.566,126.238 83.566,26.289